# Altium PCB rejestrator_trasy.PcbDoc
Units mil, origin at the board's own origin, x right, y up, seen from the top; angles counter-clockwise.
Board outline 3503.94 x 1574.8 mil, 2 copper layers (Top Layer, Bottom Layer); 47 components, 39 nets, 211 pads, 16 vias.
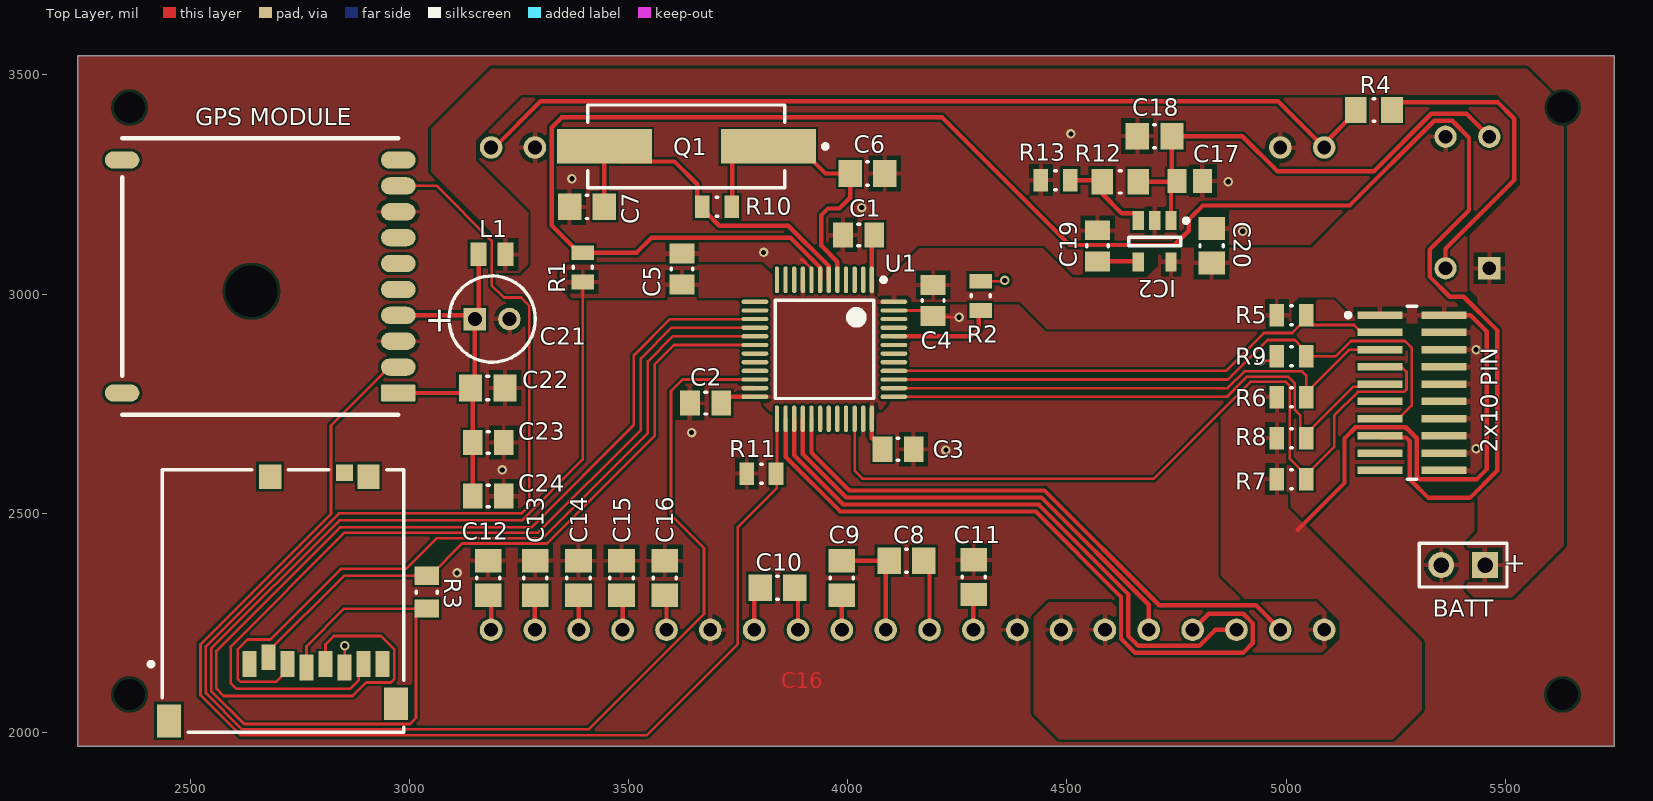
[diagram p0: Top Layer view]
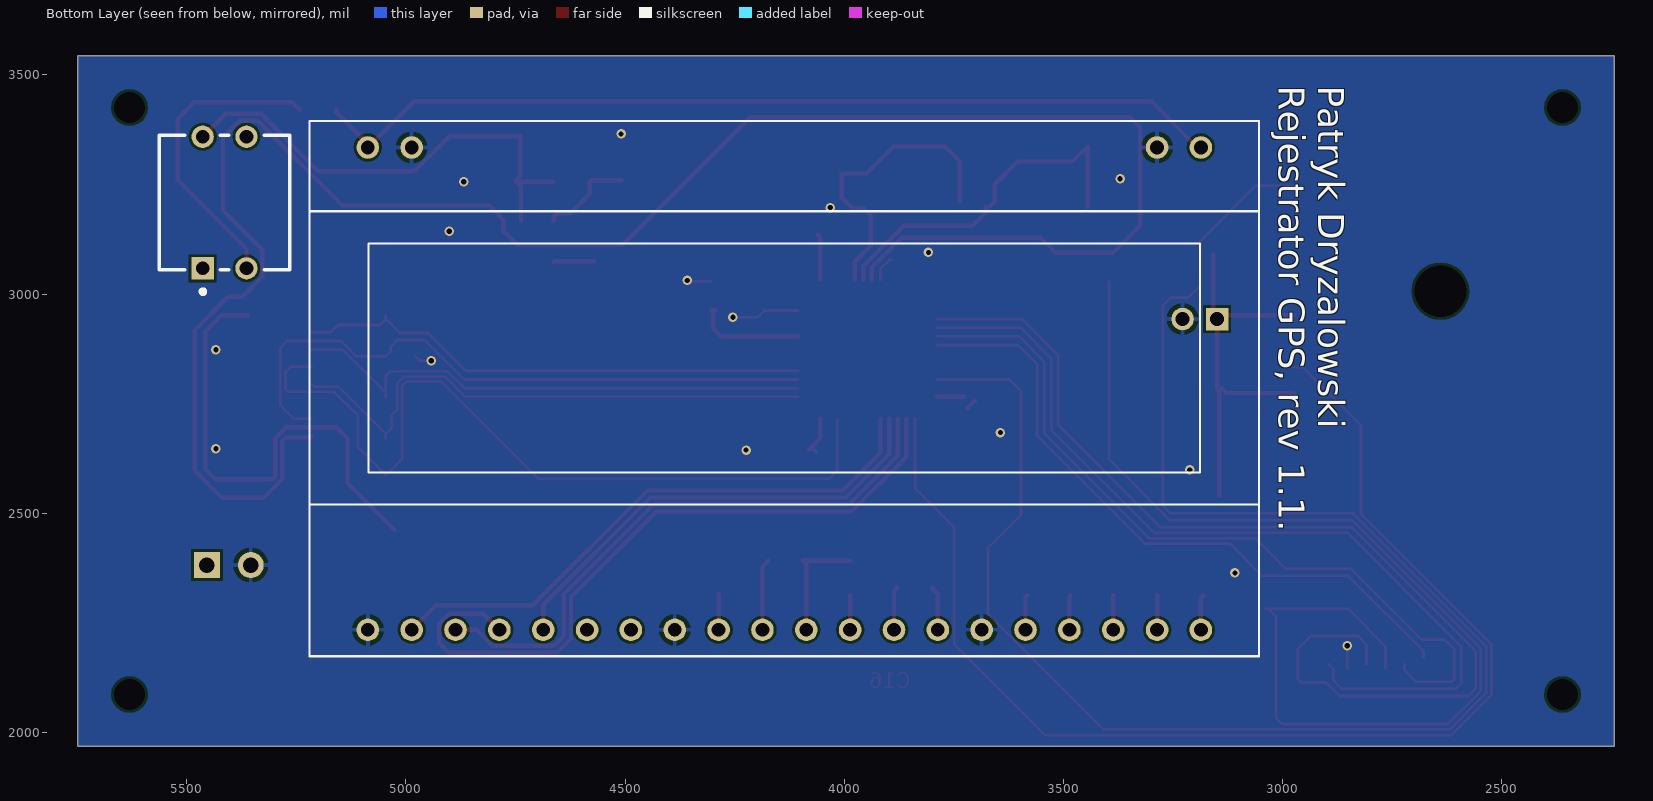
[diagram p1: Bottom Layer view, seen from below]

## Layer stack, top to bottom
Top Solder: solder mask 0.4, Solder Resist, Dk 3.5
Top Layer: signal copper 1.4
Dielectric 1: dielectric 12.6, FR-4, Dk 4.8
Bottom Layer: signal copper 1.4
Bottom Solder: solder mask 0.4, Solder Resist, Dk 3.5

## Board outline
2244.09,1968.5 5748.03,1968.5 5748.03,3543.31 2244.09,3543.31

## Design rules (kind name [scope] priority, off if disabled: settings)
Clearance [All] p1: gap=6 ignorepadtopadclearanceinfootprint=FALSE except(0: Arc-Hole Track-Hole SMDPad-Hole THPad-Hole Via-Hole Fill-Hole Poly-Hole Region-Hole Text-Hole)
PolygonConnect [All] p1: thpad.connectstyle=Relief thpad.reliefconductorwidth=10 thpad.reliefentries=4 thpad.polygonreliefangle="90 Angle" thpad.airgapwidth=10 smdpad.connectstyle=Relief smdpad.reliefconductorwidth=10 smdpad.reliefentries=4 smdpad.polygonreliefangle="90 Angle" smdpad.airgapwidth=10 via.connectstyle=Direct via.reliefconductorwidth=10 via.reliefentries=4 via.polygonreliefangle="90 Angle" via.airgapwidth=10
RoutingVias [All] p1: holewidth=11.81 width=21.65 viastyle="Through Hole" minholewidth=11.81 minwidth=21.65 maxholewidth=11.81 maxwidth=21.65
SolderMaskExpansion [All] p1: expansion=4
Width [All] p1: maxlimit=10 minlimit=6 preferedwidth=10 minimp=50.000000 maximp=50.000000 favimp=50.000000
30 further rules are at their usual default settings.

## Classes and differential pairs
component class PD_SCH_19Z_C: "2x10 PIN" BATT C1 C2 C3 C4 C5 C6 C7 C8 C9 C10 C11 C12 C13 C14 C15 C16 C17 C18 C19 C20 C21 C22 C23 C24 "GPS MODULE" IC2 L1 Q1 R1 R2 R3 R4 R5 R6 R7 R8 R9 R10 R11 R12 R13 U1

## Components (designator, comment, footprint, x,y, rotation, side; value= is the part's Value field where it differs from the comment)
"2x10 PIN" "SV1" "GOLDPIN 2x10 SMD" 5285.43,2775.59 r270 top
BATT "(3xAAA)" BAT-2 5403.54,2381.89 r180 top
C1 "CAP 100nF 25V 0805(2012)" CAPC0805(2012)75_N 4025,3135 r0 top value=100nF
C2 "CAP 100nF 25V 0805(2012)" CAPC0805(2012)75_N 3676,2751 r180 top value=100nF
C3 "CAP 100nF 25V 0805(2012)" CAPC0805(2012)75_N 4115,2646 r0 top value=100nF
C4 "CAP 100nF 25V 0805(2012)" CAPC0805(2012)75_N 4195,2985 r270 top value=100nF
C5 "CAP 100nF 25V 0805(2012)" CAPC0805(2012)75_N 3622.05,3057.09 r90 top value=100nF
C6 "CAP 22pF 10V 0805(2012)" CAPC0805(2012)100_M 4045,3275 r180 top value=22pF
C7 "CAP 22pF 10V 0805(2012)" CAPC0805(2012)100_M 3405.51,3198.82 r0 top value=22pF
C8 "CAP 1uF 10V 0805(2012)" CAPC0805(2012)145_M 4133.86,2391.73 r0 top value=1uF
C9 "CAP 1uF 10V 0805(2012)" CAPC0805(2012)145_M 3986.22,2352.36 r90 top value=1uF
C10 "CAP 1uF 10V 0805(2012)" CAPC0805(2012)145_M 3840,2330 r180 top value=1uF
C11 "CAP 1uF 10V 0805(2012)" CAPC0805(2012)145_M 4287.4,2354.33 r90 top value=1uF
C12 "CAP 1uF 10V 0805(2012)" CAPC0805(2012)145_M 3180,2352.36 r90 top value=1uF
C13 "CAP 1uF 10V 0805(2012)" CAPC0805(2012)145_M 3287.4,2352.36 r90 top value=1uF
C14 "CAP 1uF 10V 0805(2012)" CAPC0805(2012)145_M 3385.83,2352.36 r90 top value=1uF
C15 "CAP 1uF 10V 0805(2012)" CAPC0805(2012)145_M 3484.25,2352.36 r90 top value=1uF
C16 "CAP 1uF 10V 0805(2012)" CAPC0805(2012)145_M 3582.68,2352.36 r90 top value=1uF
C17 "Cap Pol3" C0805 4780,3257.95 r0 top value=100uF
C18 "CAP 1uF 10V 0805(2012)" CAPC0805(2012)145_M 4700,3360 r0 top value=1uF
C19 "CAP 10nF 16V 0805(2012)" CAPC0805(2012)75_N 4570,3110 r270 top value=10nF
C20 "CAP 1uF 10V 0805(2012)" CAPC0805(2012)145_M 4830,3110 r270 top value=1uF
C21 "ECA1HM100" CAPPR55-200-1100X500X1200 3188.98,2942.91 r0 top
C22 "CAP 1uF 10V 0805(2012)" CAPC0805(2012)145_M 3179.13,2785.43 r180 top value=1uF
C23 "CAP 100nF 25V 0805(2012)" CAPC0805(2012)75_N 3180.12,2661.42 r180 top value=100nF
C24 "CAP 10nF 16V 0805(2012)" CAPC0805(2012)75_N 3180.12,2539.37 r180 top value=10nF
DISPLAY "EADOGM132" "EA DOGM132" 4136.61,2854.33 r180 bottom locked
"GPS MODULE" "FGPMMOPA6B" GTPA010 2660,3040 r180 top
IC2 "LP3985" SOT-23 4700,3120 r270 top
L1 "BRC2012T2R2MD" INDC2013X140X50LL20T20 3188.98,3090.55 r180 top
Q1 "Quartz" TXC-9C-2_V 3631.89,3336.61 r180 top
R1 "10K 5% 0805(2012)" RESC0805(2012)_L 3395.67,3061.02 r270 top value=10K
R2 "10K 5% 0805(2012)" RESC0805(2012)_L 4303.15,2996.06 r270 top value=10K
R3 "4K7 5% 0805(2012)" RESC0805(2012)_N 3040,2320 r270 top value=4K7
R4 "100R 5% 0805(2012)" RESC0805(2012)_M 5200,3420 r0 top value=100
R5 "10K 5% 0805(2012)" RESC0805(2012)_L 5012,2952 r180 top value=10K
R6 "10K 5% 0805(2012)" RESC0805(2012)_L 5012,2765 r180 top value=10K
R7 "10K 5% 0805(2012)" RESC0805(2012)_L 5012,2578 r180 top value=10K
R8 "10K 5% 0805(2012)" RESC0805(2012)_L 5012,2671.5 r180 top value=10K
R9 "10K 5% 0805(2012)" RESC0805(2012)_L 5012,2858.5 r0 top value=10K
R10 "1M 5% 0805(2012)" RESC0805(2012)_L 3702,3199 r0 top value=1M
R11 "10K 5% 0805(2012)" RESC0805(2012)_L 3803.15,2590.55 r0 top value=10K
R12 "100R 5% 0805(2012)" RESC0805(2012)_M 4621.65,3255.98 r0 top value=100
R13 "10K 5% 0805(2012)" RESC0805(2012)_L 4474.02,3259.92 r0 top value=10K
"SD SOCKET" "MICROSD" "SD CONN" 2720,2300 r180 top
SW1 "1825057-1" TE_Connectivity_1825057-1_MFG 5413.39,3208.66 r180 bottom
U1 "STM32F103C8T6" LQFP48 3946.85,2874.02 r180 top

## Footprints (in the part's own frame and the unit in brackets; to place one, negate y for a bottom-side part, rotate by r counter-clockwise, add the part's x,y. Pads: shape width x height; smd on the part's side, far side on the other; paste and mask are expansions set on the pad)
BAT-2 [mm] "Battery; 2 Leads"
  rect 1.5x1.5 hole 0.9: 1(-1.27,0)
  round 1.5 hole 0.9: 2(1.27,0)
  silkscreen extent -2.54,-1.27 2.54,1.27
C0805 [mm] "Chip Capacitor, Body 2.0x1.3mm, IPC High Density"
  rect 1.1x1.4 smd: 1(-0.75,0) 2(0.75,0)
  body extent -1.1,-0.72 1.1,0.72, height 1.4
CAPC0805(2012)75_N [mm] "Chip Capacitor, Body 2.0x1.2mm, Height 0.75mm, IPC Medium Density"
  rect 1.15x1.45 smd: 1(-0.9,0) 2(0.9,0)
  silkscreen extent -0.05,-0.62 0.05,0.62, body extent -1.1,-0.72 1.1,0.73, height 0.75
CAPC0805(2012)100_M [mm] "Chip Capacitor, Body 2.0x1.2mm, Height 1.0mm, IPC Low Density"
  rect 1.35x1.55 smd: 1(-1,0) 2(1,0)
  silkscreen extent -0.05,-0.67 0.05,0.68, body extent -1.1,-0.72 1.1,0.72, height 1
CAPC0805(2012)145_M [mm] "Chip Capacitor, Body 2.0x1.2mm, Height 1.45mm, IPC Low Density"
  rect 1.35x1.55 smd: 1(-1,0) 2(1,0)
  silkscreen extent -0.05,-0.67 0.05,0.67, body extent -1.1,-0.72 1.1,0.72, height 1.45
CAPPR55-200-1100X500X1200 [mm] "THD, 2-Leads, Dia 5mm, Body Length 11mm"
  rect 1.3x1.3 hole 0.8: 1(-1,0)
  round 1.3 hole 0.8: 2(1,0)
  silkscreen extent -2.5,-2.5 2.5,2.5, body extent -2.5,-2.5 2.5,2.5, height 12
"EA DOGM132" [mm]
  round 1.308 hole 0.8: 1(-24.13,12.19) 2(-21.59,12.19) 19(21.59,12.19) 20(24.13,12.19) 21(24.13,-15.75) 22(21.59,-15.75) 23(19.05,-15.75) 24(16.51,-15.75) 25(13.97,-15.75) 26(11.43,-15.75) 27(8.89,-15.75) 28(6.35,-15.75) 29(3.81,-15.75) 30(1.27,-15.75) 31(-1.27,-15.75) 32(-3.81,-15.75) 33(-6.35,-15.75) 34(-8.89,-15.75) 35(-11.43,-15.75) 36(-13.97,-15.75) 37(-16.51,-15.75) 38(-19.05,-15.75) 39(-21.59,-15.75) 40(-24.13,-15.75)
  silkscreen extent -27.5,-17.28 27.5,13.72, body extent -27.5,-17.25 27.5,13.75, height 3
"GOLDPIN 2x10 SMD" [mm]
  rect 0.44x2.6 smd: 1(-4.481,-1.811) 2(-4.481,1.889) 3(-3.481,-1.811) 4(-3.481,1.889) 5(-2.481,-1.811) 6(-2.481,1.889) 7(-1.481,-1.811) 8(-1.481,1.889) 9(-0.481,-1.811) 10(-0.481,1.889) 11(0.519,-1.811) 12(0.519,1.889) 13(1.519,-1.811) 14(1.519,1.889) 15(2.519,-1.811) 16(2.519,1.889) 17(3.519,-1.811) 18(3.519,1.889) 19(4.519,-1.811) 20(4.519,1.889)
  silkscreen extent -4.98,-3.79 5.02,0.3, body extent -4.98,-2.56 5.02,2.64, height 3.5
GTPA010 [mm]
  rrect20% 2x1 smd: 1(-8,6.75)
  rrect100% 2x1 smd: 2(-8,5.25) 3(-8,3.75) 4(-8,2.25) 5(-8,0.75) 6(-8,-0.75) 7(-8,-2.25) 8(-8,-3.75) 9(-8,-5.25) 10(-8,-6.75) 11(8,6.75) 12(8,-6.75)
  rrect100% 0x0 hole 3 unplated: 13(0.5,0.85)
  silkscreen extent -8,-8 8,8, body extent -8.01,-8 8.01,8, height 6.49
INDC2013X140X50LL20T20 [mm] "Chip Inductor, 2-Leads, Body 2.2x1.45mm, IPC High Density"
  rect 0.93x1.37 smd: 1(-0.785,0) 2(0.785,0)
  body extent -1.1,-0.72 1.1,0.72, height 1.4
LQFP48 [mm]
  oval 0.25x1.55 smd: 1(-2.75,-4.025) 2(-2.25,-4.025) 3(-1.75,-4.025) 4(-1.25,-4.025) 5(-0.75,-4.025) 6(-0.25,-4.025) 7(0.25,-4.025) 8(0.75,-4.025) 9(1.25,-4.025) 10(1.75,-4.025) 11(2.25,-4.025) 12(2.75,-4.025) 25(2.75,4.025) 26(2.25,4.025) 27(1.75,4.025) 28(1.25,4.025) 29(0.75,4.025) 30(0.25,4.025) 31(-0.25,4.025) 32(-0.75,4.025) 33(-1.25,4.025) 34(-1.75,4.025) 35(-2.25,4.025) 36(-2.75,4.025)
  oval 1.55x0.25 smd: 13(4.025,-2.75) 14(4.025,-2.25) 15(4.025,-1.75) 16(4.025,-1.25) 17(4.025,-0.75) 18(4.025,-0.25) 19(4.025,0.25) 20(4.025,0.75) 21(4.025,1.25) 22(4.025,1.75) 23(4.025,2.25) 24(4.025,2.75) 37(-4.025,2.75) 38(-4.025,2.25) 39(-4.025,1.75) 40(-4.025,1.25) 41(-4.025,0.75) 42(-4.025,0.25) 43(-4.025,-0.25) 44(-4.025,-0.75) 45(-4.025,-1.25) 46(-4.025,-1.75) 47(-4.025,-2.25) 48(-4.025,-2.75)
  silkscreen extent -3.55,-4.15 2.85,2.85, body extent -3.5,-3.5 3.5,3.5, height 6
RESC0805(2012)_L [mm] "Chip Resistor, Body 2.0x1.3mm, IPC High Density"
  rect 0.85x1.3 smd: 1(-0.85,0) 2(0.85,0)
  silkscreen extent -0.05,-0.55 0.05,0.55, body extent -1.1,-0.67 1.1,0.68, height 0.7
RESC0805(2012)_M [mm] "Chip Resistor, Body 2.0x1.3mm, IPC Low Density"
  rect 1.25x1.5 smd: 1(-1.05,0) 2(1.05,0)
  silkscreen extent -0.05,-0.65 0.05,0.65, body extent -1.1,-0.67 1.1,0.67, height 0.7
RESC0805(2012)_N [mm] "Chip Resistor, Body 2.0x1.3mm, IPC Medium Density"
  rect 1.05x1.4 smd: 1(-0.95,0) 2(0.95,0)
  silkscreen extent -0.05,-0.6 0.05,0.6, body extent -1.1,-0.67 1.1,0.68, height 0.7
"SD CONN" [mm]
  rect 0.8x1.5 smd: 1(2.14,3.66) 2(1.04,3.26) 3(-0.06,3.66) 4(-1.16,3.86) 5(-2.26,3.66) 6(-3.36,3.86) 7(-4.46,3.66) 8(-5.56,3.66)
  rect 1x0.95 smd: 9(-3.36,-7.425)
  rect 1.3x1.4 smd: 10(-4.75,-7.2) 11(0.95,-7.2)
  rect 1.4x1.9 smd: 12(6.8,6.95) 13(-6.35,5.95)
  silkscreen extent -6.8,-7.6 7.97,7.6, body extent -6.85,-7.68 7.25,7.52, height 1.85
SOT-23 [mm]
  rect 1.1x0.65 smd: 1(-1.2,0.95) 2(-1.2,0) 3(-1.2,-0.95) 4(1.2,-0.95) 5(1.2,0.95)
  silkscreen extent -1.32,-1.5 0.25,1.95, body extent -0.83,-1.49 8.59,1.5, height 3
TE_Connectivity_1825057-1_MFG [mm]
  rect 1.29x1.29 hole 0.79 paste-1000 mask+0: 1(-1.27,-3.81)
  round 1.29 hole 0.79 paste-1000 mask+0: 2(1.27,-3.81) 3(1.27,3.81) 4(-1.27,3.81)
  silkscreen extent -3.78,-5.28 3.78,3.9, body extent -3.53,-4.19 3.53,4.19, height 6.15
TXC-9C-2_V [mm] "SMD, 2-Leads, Body 11.4 x 4.8 mm, Height 4.1 mm"
  rect 5.5x2 smd: 1(-4.75,0) 2(4.75,0)
  silkscreen extent -8.18,-2.4 5.7,2.4, body extent -5.7,-2.4 5.7,2.4, height 4.1

## Part data
BATT: library part Battery, "Multicell Battery", LatestRevisionDate=17-Jul-2002, LatestRevisionNote="Re-released for DXP Platform.", PackageDescription="Battery; 2 Leads", PackageReference=BAT-2, Published=24-Mar-1999, Publisher="Altium Limited"
C1 C2 C3 C4 C5 C23: library part CMP-1036-04415-1, "CAP 100nF 25V -20% to +80% 0805 (2012 Metric) Thickness 0.75mm SMD", Case-EIA=0805, Case-Metric=2012, Rated Voltage="25 V", Tolerance="-20% to +80%", Max Thickness="0.75 mm", Technology=SMT
C6 C7: library part CMP-1036-01213-1, "CAP 22pF 10V ±20% 0805 (2012 Metric) Thickness 1mm SMD", Case-EIA=0805, Case-Metric=2012, Rated Voltage="10 V", Tolerance=±20%, Max Thickness="1 mm", Technology=SMT
C8 C9 C10 C11 C12 C13 C14 C15 C16 C18 C20 C22: library part CMP-1036-04740-1, "CAP 1uF 10V ±20% 0805 (2012 Metric) Thickness 1.45mm SMD", Case-EIA=0805, Case-Metric=2012, Rated Voltage="10 V", Tolerance=±20%, Max Thickness="1.45 mm", Technology=SMT
C17: "Polarized Capacitor (Surface Mount)", LatestRevisionDate=29-May-2009, LatestRevisionNote="IPC-7351 Footprint Added.", PackageDescription="Chip Capacitor", PackageReference=C0805, Published=8-Jun-2000, Publisher="Altium Limited"
C19 C24: library part CMP-1036-03821-1, "CAP 10nF 16V ±20% 0805 (2012 Metric) Thickness 0.75mm SMD", Case-EIA=0805, Case-Metric=2012, Rated Voltage="16 V", Tolerance=±20%, Max Thickness="0.75 mm", Technology=SMT
C21: library part CMP-2100-03622-1, "Aluminum Electrolytic Capacitor, 10 uF, +/- 20%, 50 V, -40 to 85 degC, 2-Pin THD, RoHS, Bulk", Capacitance=10uF, Case/Package=Radial, Dielectric Material=Aluminium, Leakage Current=3uA, Manufacturer=Panasonic, Max Operating Temperature=85degC, Min Operating Temperature=-40degC, Package Description="2-Pin Radial Lead, Dia 5 mm, Height 12 mm", Package Quantity=200, Package Reference=CAPPR55-200-1100X500X1200, Ripple Current=65mA, Tolerance=20%, Voltage=50V, Datasheet URL=https://industrial.panasonic.com/cdbs/www-data/pdf/RDF0000/ABA0000C1218.pdf, Datasheet Version="Rev. 05, 10/2016", Diameter=5mm, Dissipation Factor=0.12%, Height=11mm, Height - Seated (Max)=0.472inch, Lead/Base Style=Straight, Lead Diameter=0.5mm, Lead Free=LeadFree, Lead Pitch=2mm, Length=11mm, Life (Hours)=2000Hour, Manufacturer URL=http://www.panasonic.com/, Mount=ThroughHole, Number of Pins=2, Packaging=Bulk, Radiation Hardening=No, REACH SVHC=NoSVHC, Ripple Current (AC)=65mA, RoHSCompliant=true, Termination=Radial, Voltage Rating=50V, Voltage Rating (DC)=50V
DISPLAY: library part "EA DOGM132"
L1: library part CMP-2000-05964-1, "Wire-Wound Chip Power Inductor, 2.2 uH, +/- 20%, -40 to 105 degC, 2-Pin SMD (0805), RoHS, Tape and Reel", Current - Saturation=1.1A, Current Rating=1A, DC Resistance (DCR)=143mOhmMax, Frequency - Self Resonant=350MHz, Frequency - Test=1MHz, Inductance=10uH, Manufacturer="Taiyo Yuden", Operating Temperature=-40°C~105°C, Package / Case=0805(2012Metric), Package Description="2-Pin Surface Mount Device, Body 2 x 1.25 mm", Package Reference=0805, Standard Package=2,000, Tolerance=±20%, Category=Inductors,Coils,Chokes, Datasheet URL=http://ds.yuden.co.jp/TYCOMPAS/ut/detail.do?productNo=BRC2012T2R2MD&fileName=BRC2012T2R2MD_SS&mode=specSheetDownload, Datasheet Version=09/2016, EDA / CAD Models=DownloadfromAcceleratedDesigns, Family=FixedInductors, Manufacturer URL=http://www.t-yuden.com/, Mounting Technology=SurfaceMount, Mounting Type=SurfaceMount, Online Catalog=BRSeries, Other Names="587-2905-2 / LQBRC2012T2R2MD", Packaging=Tape&Reel(TR), Series=BR, Shielding=Unshielded, Type=Wirewound
Q1: library part CMP-0724-00001-1, "9C Series Quartz Crystal, 3.6864 MHz, +/-50 ppm, 20 pF, -40 to 85 degC, 2-Pin 11.4 x 4.8 x 4.1 mm SMD, RoHS, Tape and Reel", Frequency=8.00MHz, Frequency Stability (over Temp.)="+/-50 ppm (-20 to 70 degC)", Frequency Tolerance (at 25 degC)="+/-50 ppm", Load Capacitance="20 pF", Manufacturer=TXC, Operating Temperature Range="-40 to 85 degC", PartNumber=9C-3.6864MBBK-T, ComponentLink1Description="Manufacturer URL", ComponentLink1URL=http://www.txccrystal.com/, ComponentLink2Description=Datasheet, ComponentLink2URL=http://www.txccrystal.com/images/pdf/9c.pdf, ComponentLink3Description="Package Specification", ComponentLink3URL=http://www.txccrystal.com/images/pdf/9c.pdf, DatasheetVersion=Jun-10, Mounting Technology="Surface Mount", PackageDescription="2-Pin SMD, Body 11.4 x 4.8 mm, Height 4.1 mm", PackageReference=9C-2, PackageVersion=Jun-10, Packing="Tape and Reel", RoHS=TRUE
R1 R2 R5 R6 R7 R8 R9 R11 R13: library part CMP-1013-00098-1, "10K 0.125W 5% 0805 (2012 Metric)  SMD", Case-EIA=0805, Case-Metric=2012, Power="0.125 W", Tolerance="5 %", Technology=SMT
R3: library part CMP-1013-00090-1, "4K7 0.125W 5% 0805 (2012 Metric)  SMD", Case-EIA=0805, Case-Metric=2012, Power="0.125 W", Tolerance="5 %", Technology=SMT
R4 R12: library part CMP-1013-00050-1, "100R 0.125W 5% 0805 (2012 Metric)  SMD", Case-EIA=0805, Case-Metric=2012, Power="0.125 W", Tolerance="5 %", Technology=SMT
R10: library part CMP-1013-00146-1, "1M 0.125W 5% 0805 (2012 Metric)  SMD", Case-EIA=0805, Case-Metric=2012, Power="0.125 W", Tolerance="5 %", Technology=SMT
SW1: library part CMP-03205-00126-1, "SWITCH SLIDE DIP SPST 100MA 24V", Contact Current Rating=100mA, Contact Resistance=50m?, Manufacturer="TE Connectivity", Temperature="-30°C to +85°C", Temperature Range High=+85°C, Temperature Range Low=-30°C, Voltage Rating Dc=24V, Automotive=No, ComponentLink1Description=Datasheet, ComponentLink1URL=https://www.te.com/usa-en/product-1825057-1.html?te_bu=Cor&te_type=other&te_campaign=oct_glo_cor-oct-global-oth-prtnr-fy19-oct-octo-buy-bom_sma-298_2&elqCampaignId=35216, Electromechanical Life=1000Cycles, Height=6.15mm, Lead Free=Yes, Mount="Through Hole", Number Of Circuits=2, Package=1825057-1, PartId=1, Part Number=1825057-1, RoHS=TRUE, Standoff Height=1.3mm, Throw Configuration=SPST
"GPS MODULE": helpURL=https://cdn-shop.adafruit.com/datasheets/PA6B-Datasheet-A07.pdf, Supplier=GlobalTop
U1: helpURL=https://pdf1.alldatasheet.com/datasheet-pdf/view/201596/STMICROELECTRONICS/STM32F103C8T6.html, Supplier=STMicroelectronics

## Free pads (board coordinates)
  round 0 hole 70.87: 45(2362.2,2086.61) 45(2362.2,3425.2) 45(5629.92,2086.61) 45(5629.92,3425.2)

## Via types
v1: diameter 21.65, hole 11.81, Top Layer to Bottom Layer, tented both sides, 16 vias

## Nets (pads, with @x,y where several pads share a name; then routed paths per layer and width w, separated by ;. In a path a pad name is that pad's centre, name@x,y a point inside that pad or via, vN(x,y) a via of type N, cw(c..) or ccw(c..) an arc to the next point about the centre after c; other vN are vias at no path point)
+3V3: "2x10 PIN.1" "2x10 PIN.2" "SD SOCKET.4" C1.2 C2.1 C3.1 C4.1 C5.1 C20.2 DISPLAY.34 DISPLAY.35 IC2.5 R1.2 R3.2 R5.2 R6.2 R7.2 R8.2 SW1.3 U1.1 U1.9 U1.24 U1.36 U1.48 | length 4048.2
  Top Layer w6: 2765.67,2148.03 2765.67,2196.67 2851.6,2282.6 R3.2@3033.11,2282.6 ; R3.2 R3.2@3033.11,2282.6 ; R1.2 3395.67,2622.7 3256.97,2484 2840.78,2484 2548,2191.22 2548,2095.03 2623.68,2019.35 3001.29,2019.35 3015.44,2033.5 3015.44,2264.93 R3.2@3033.11,2282.6
  Top Layer w10: C2.1@3702.57,2756 C2.1@3718.75,2739.82 ; C2.1@3726.18,2765.75 U1.24 ; U1.36 4055.12,2670.45 C3.1 ; U1.1 4055.12,3129.68 C1.2 ; C3.1@4064.57,2640 C3.1@4070.12,2645.55 ; 5026,2462 5133,2569 5133,2670.68 5158.4,2696.08 5272.55,2696.08 5297.62,2671.01 5297.62,2584.46 5304.07,2578.02 5435.02,2578.02 5457,2600 5457,2915 5419.99,2952.01 5359.8,2952.01
GND: "2x10 PIN.4" "2x10 PIN.6" "2x10 PIN.8" "2x10 PIN.10" "2x10 PIN.12" "2x10 PIN.14" "2x10 PIN.16" "2x10 PIN.18" "2x10 PIN.20" "GPS MODULE.3" "GPS MODULE.8" "SD SOCKET.6" BATT.2 C1.1 C2.2 C3.2 C4.2 C5.2 C6.1 C7.1 C11.2 C12.2 C13.2 C14.2 C15.2 C16.2 C17.2 C18.1 C19.1 C20.1 C21.2 C22.1 C23.1 C24.1 DISPLAY.2 DISPLAY.19 DISPLAY.26 DISPLAY.33 DISPLAY.40 IC2.2 R2.1 R9.1 R11.1 R13.1 U1.8 U1.23 U1.35 U1.47 | length 360.3
  Top Layer w6: 2852.28,2148.03 2853,2148.75 v1(2853,2198) ; 3893,3079 3894,3078 3897.4,3078 3917.32,3058.07 U1.8 ; U1.47 4181.97,2962.6 C4.2 4197.57,2947 v1(4254,2947) ; R2.1 4356.53,3029.53 v1(4358,3031) ; v1(4942,2848) 4968.04,2848 R9.1
  other v1: 3109,2364 3212,2599 4224,2644 5433,2647 3644,2684 5433,2873 3808,3095 4901,3143 4032,3197 4868,3256 3371,3263 4509,3365
"Net2x10 PIN_3": "2x10 PIN.3" R5.1 U1.40 | length 1179.3
  Top Layer w6: U1.40 4862.8,2824.8 4949.09,2911.09 5013.41,2911.09 R5.1@5045.46,2943.14 ; R5.1 R5.1@5045.46,2943.14 ; 5214.13,2912.64 5171.61,2912.64 5154.84,2929.41 5059.2,2929.41 R5.1@5045.46,2943.14
"Net2x10 PIN_5": "2x10 PIN.5" R6.1 U1.38 | length 1218.9
  Top Layer w6: U1.38 4866.29,2785.43 4904.44,2823.59 5036.02,2823.59 5045.46,2814.14 R6.1@5045.46,2773.86 ; R6.1 R6.1@5045.46,2773.86 ; 5214.13,2873.27 5144.87,2873.27 R6.1@5045.46,2773.86
"Net2x10 PIN_7": "2x10 PIN.7" R7.1 U1.34 | length 1890
  Top Layer w6: U1.34 4015.75,2597.08 4033.83,2579 4698,2579 4918.59,2799.59 4999,2799.59 5007.73,2790.86 5007.73,2624.59 5045.46,2586.86 5109.21,2650.6 5109.21,2722.8 5163.27,2776.87 5269.04,2776.87 5274.31,2782.14 5274.31,2822.69 5263.1,2833.9 5214.13,2833.9
"Net2x10 PIN_9": "2x10 PIN.9" R8.1 U1.37 | length 1290.9
  Top Layer w6: U1.37 4864.75,2765.75 4910.59,2811.59 5003.97,2811.59 5019.73,2795.83 5019.73,2735.68 5031.73,2723.68 5031.73,2694.09 R8.1@5045.46,2680.36 ; R8.1 R8.1@5045.46,2680.36 ; 5214.13,2794.53 5208.47,2788.87 5153.97,2788.87 R8.1@5045.46,2680.36
"Net2x10 PIN_13": "2x10 PIN.13" R9.2 U1.39 | length 1477.2
  Top Layer w6: U1.39 4867.27,2805.12 4957.25,2895.09 5019.91,2895.09 5034.14,2880.86 5034.14,2869.82 R9.2 5113.14,2858.5 5147.64,2893 5271,2893 5286.31,2877.69 5286.31,2745.45 5256.65,2715.79 5214.13,2715.79
"Net2x10 PIN_15": "2x10 PIN.15" R1.1 U1.7 | length 4582.6
  Top Layer w10: U1.7 3937.01,3060.9 3869.91,3128 3552.02,3128 3518.51,3094.49 R1.1 3386.81,3094.49 3325,3156.3 3325,3379.93 3348.07,3403 4215,3403 4506.21,3111.79 4744.79,3111.79 4777.49,3144.49 4777.49,3169.51 4786.47,3178.48 4809.99,3202 5144.63,3202 5337.68,3395.06 5378.46,3395.06 5417,3356.52 5417,3191 5326.99,3100.99 5326.99,3040.01 5373,2994 5405,2994 5481,2918 5481,2597 5419,2535 5324.45,2535 5281.62,2577.83 5281.62,2664.38 5273.24,2672.76 5217.79,2672.76 5214.13,2676.42
NetBATT_1: BATT.1 L1.1 SW1.1
NetC6_2: C6.2 Q1.1 R10.2 U1.5 | length 699
  Top Layer w10: R10.2@3736.46,3212 3736.46,3302.24 3770.83,3336.61 Q1.1 3887.8,3336.61 3949.41,3275 C6.2 4005.63,3220 3980.63,3195 3955,3195 3940,3180 3940,3110 3976.38,3073.62 U1.5
NetC7_2: C7.2 Q1.2 R10.1 U1.6 | length 816.6
  Top Layer w10: C7.2 Q1.2 3479.25,3302.24 3604.76,3302.24 3656.8,3250.2 3656.8,3210.73 R10.1 ; R10.1@3676,3199 3676,3187 3707,3156 3864.54,3156 3956.61,3063.92 3956.61,3032.56 U1.6
NetC8_1: C8.1 C9.2 DISPLAY.30 | length 269
  Top Layer w10: C9.2 C8.1 4086.61,2383.86 DISPLAY.30
NetC8_2: C8.2 DISPLAY.31 | length 163
  Top Layer w10: C8.2 4186.61,2378.35 DISPLAY.31
NetC9_1: C9.1 DISPLAY.29 | length 78.9
  Top Layer w10: C9.1 3986.61,2312.6 DISPLAY.29
NetC10_1: C10.1 DISPLAY.28 | length 98.7
  Top Layer w10: C10.1 3886.61,2322.76 DISPLAY.28
NetC10_2: C10.2 DISPLAY.27 | length 101.6
  Top Layer w10: DISPLAY.27 3786.61,2315.98 C10.2
NetC11_1: C11.1 DISPLAY.32 | length 81
  Top Layer w10: DISPLAY.32 4286.61,2314.17 C11.1
NetC12_1: C12.1 DISPLAY.21 | length 81.5
  Top Layer w10: C12.1 3186.61,2306.38 DISPLAY.21
NetC13_1: C13.1 DISPLAY.22 | length 79.1
  Top Layer w10: DISPLAY.22 3286.61,2312.2 C13.1
NetC14_1: C14.1 DISPLAY.23 | length 79.1
  Top Layer w10: C14.1 3386.61,2312.2 DISPLAY.23
NetC15_1: C15.1 DISPLAY.24 | length 79.7
  Top Layer w10: C15.1 3486.61,2310.63 DISPLAY.24
NetC16_1: C16.1 DISPLAY.25 | length 80.4
  Top Layer w10: C16.1 3586.61,2309.06 DISPLAY.25
NetC17_1: C17.1 C18.2 IC2.1 R12.2 SW1.4 | length 1121.4
  Top Layer w10: R12.2 C17.1@4748.5,3255.98 ; IC2.1 4737.4,3244.88 C17.1@4748.5,3255.98 ; SW1.4 5410.99,3411.06 5331.06,3411.06 5200,3280 4980,3280 4900,3360 C18.2 4739.37,3269.05 C17.1 C17.1@4748.5,3255.98
NetC19_2: C19.2 IC2.4 | length 93.3
  Top Layer w10: C19.2 4660.79,3074.57 IC2.4
NetC21_1: "GPS MODULE.1" "GPS MODULE.4" C21.1 C22.2 C23.2 C24.2 L1.2 | length 904.3
  Top Layer w10: 2974.96,2774.25 3128.58,2774.25 C22.2 ; 2974.96,2951.42 3141.1,2951.42 C21.1 ; C24.2 C23.2 3144.69,2780.51 3149.61,2785.43 C21.1 ; L1.2 3158.07,2951.38 C21.1
NetDISPLAY_1: DISPLAY.1 DISPLAY.20 R4.1 | length 2103.2
  Top Layer w10: DISPLAY.20 3194.25,3334.25 3300,3440 4980.87,3440 DISPLAY.1 5086.61,3343.03 5158.66,3415.08 R4.1
NetDISPLAY_36: DISPLAY.36 U1.28 | length 1069
  Top Layer w10: U1.28 3897.64,2634.99 3996.63,2536 4441.94,2536 4686.61,2291.33 DISPLAY.36
NetDISPLAY_37: DISPLAY.37 U1.26 | length 1608.8
  Top Layer w10: U1.26 3858.27,2629.1 3983.37,2504 4428.69,2504 4623.36,2309.32 4623.36,2214.01 4655.87,2181.5 4901.5,2181.5 4923.36,2203.36 4923.36,2249.47 4901.84,2271 4823.36,2271 DISPLAY.37
NetDISPLAY_38: DISPLAY.38 U1.27 | length 1343.2
  Top Layer w10: U1.27 3877.95,2632.05 3990,2520 4435.31,2520 4639.36,2315.95 4639.36,2220.64 4662.5,2197.5 4801.84,2197.5 4838.58,2234.25 DISPLAY.38
NetDISPLAY_39: DISPLAY.39 U1.29 | length 1314.1
  Top Layer w10: U1.29 3917.32,2637.93 4003.25,2552 4448.57,2552 4710.57,2290 4930.87,2290 DISPLAY.39
"NetGPS MODULE_2": "GPS MODULE.2" R11.2 U1.25 | length 2847.8
  Top Layer w6: 2974.96,2833.31 2955.28,2833.31 2821.6,2699.63 2821.6,2498.76 2524,2201.16 2524,2085.09 2615.09,1994 3542,1994 3749,2201 3749,2468 3838,2557 3838,2589.16 R11.2 3838.58,2592.52 U1.25
"NetGPS MODULE_9": "GPS MODULE.9" U1.22 | length 3925.5
  Top Layer w6: 2974.96,3246.69 3062.76,3246.69 3188,3121.45 3188,3020 3216,2992 3255,2992 3274,2973 3274,2518 3255.83,2499.83 2839.64,2499.83 2536,2196.19 2536,2090.06 2618.71,2007.35 3408.85,2007.35 3672.2,2270.7 3672.2,2420.8 3597,2496 3597,2779 3623.12,2805.12 U1.22
NetIC2_3: IC2.3 R12.1 R13.2 | length 214.7
  Top Layer w10: R13.2 4576.38,3259.92 R12.1 4580.32,3228.68 4625.1,3183.9 4654.8,3183.9 4662.6,3176.1 IC2.3
NetR2_2: R2.2 U1.44 | length 252.8
  Top Layer w10: U1.44 4280.98,2903.54 4298.72,2921.28 4298.72,2958.17 4294.29,2962.6 R2.2
NetR3_1: "SD SOCKET.2" R3.1 U1.18 | length 1507.9
  Top Layer w6: 2679.05,2171.65 2679.05,2185.43 2851.02,2357.4 R3.1 3046.89,2357.4 3120.49,2431 3314,2431 3560,2677 3560,2840 3603.86,2883.86 U1.18
NetR4_2: R4.2 SW1.2 | length 707.2
  Top Layer w10: R4.2 5258.34,3437 5483,3437 5520,3400 5520,3260 5363.39,3103.39 SW1.2
"NetSD SOCKET_3": "SD SOCKET.3" U1.17 | length 1779.7
  Top Layer w6: 2656.19,2115.52 2656.05,2115.38 ; 2722.36,2155.91 2722.36,2142.13 2695.61,2115.38 2656.05,2115.38 ; U1.17 3600.92,2903.54 3544,2846.63 3544,2683.63 3303.37,2443 3061.81,2443 2992.22,2373.4 2844.4,2373.4 2683.17,2212.18 2631.19,2212.18 2609,2189.99 2609,2121.82 2615.44,2115.38 2656.05,2115.38
"NetSD SOCKET_5": "SD SOCKET.5" U1.15 | length 2440
  Top Layer w6: 2808.98,2155.91 2808.98,2200.98 2828,2220 2935.64,2220 2965.65,2189.99 2965.65,2189.64 2965.86,2189.43 2965.86,2122.03 2957.97,2114.15 2901.86,2114.15 2871.09,2083.38 2576.62,2083.38 2560,2100 2560,2186.24 2841.76,2468 3279,2468 3512,2701 3512,2859.88 3595.03,2942.91 U1.15
"NetSD SOCKET_7": "SD SOCKET.7" U1.16 | length 2022.4
  Top Layer w6: 2895.59,2155.91 2884.84,2145.16 2884.84,2119.76 2864.46,2099.38 2605.86,2099.38 2593,2112.24 2593,2196.62 2852.38,2456 3293.75,2456 3528,2690.25 3528,2853.25 3597.97,2923.23 U1.16
pads on no net: "2x10 PIN.11" "2x10 PIN.17" "2x10 PIN.19" "GPS MODULE.5" "GPS MODULE.6" "GPS MODULE.7" "GPS MODULE.10" "GPS MODULE.11" "GPS MODULE.12" "GPS MODULE.13" "SD SOCKET.1" "SD SOCKET.8" "SD SOCKET.9" "SD SOCKET.10" "SD SOCKET.11" "SD SOCKET.12" "SD SOCKET.13" U1.2 U1.3 U1.4 U1.10 U1.11 U1.12 U1.13 U1.14 U1.19 U1.20 U1.21 U1.30 U1.31 U1.32 U1.33 U1.41 U1.42 U1.43 U1.45 U1.46

## Polygon pours and split planes (outlines as drawn)
GND on Top Layer "GND_L01_P004" (solid, pour order 4): 2244.09,1968.5 5748.03,1968.5 5748.03,3543.31 2244.09,3543.31
NetBATT_1 on Top Layer "NETBATT_1_L01_P000" (solid, remove dead copper, pour order 0): 3188,3048 3251,3048 3271,3068 3271,3185 3152,3304 3152,3351 3255,3454 5480,3454 5534,3400 5534,3249 5419,3134 5419,3010 5437,2992 5437,2457 5412,2432 5412,2325 5428,2309 5516,2309 5633,2426 5633,3430 5549,3514 3187,3514 3050,3377 3050,3279 3188,3141
+3V3 on Top Layer "+3V3_L01_P002" (solid, remove dead copper, pour order 2): 5353,3387 5375,3387 5406,3356 5406,3192 5330,3116 5330,3037 5412.15,2954.85 5412.15,2942.18 5402.98,2933 5172,2933 5112,2993 5029,2993 5012,2976 5012,2936 4996,2920 4455,2920 4392.72,2982.28 4365.28,2982.28 4105.31,2982.28 4105.31,2765.75 4055.12,2715.55 3838.58,2715.55 3788.39,2765.75 3788.39,2982.28 3779.67,2991 3371,2991 3343,3019 3343,3049 3361,3067 3804.06,3067 3838.58,3032.48 4091.48,3032.48 4163,3104 4445,3104 4512,3037 4681,3037 4708,3064 4708,3092 4722,3106 5058,3106 5335,3383
+3V3 on Top Layer "+3V3_L01_P001" (solid, remove dead copper, pour order 1): 4958.79,2799.59 4963.16,2795.22 5003.36,2795.22 5003.36,2512.64 5309,2207 5309,2051 5243,1985 4482,1985 4424,2043 4424,2263 4458,2297 4601,2297 4618,2280 4618,2219.37 4661.37,2176 5085,2176 5122,2213 5122,2254 5071,2305 4905,2305 4851,2359 4851,2732 4918.59,2799.59
GND on Bottom Layer "GND_L02_P006" (solid, pour order 6): 2244.09,1968.5 5748.03,1968.5 5748.03,3543.31 2244.09,3543.31

## Other copper
Top Layer:
  text "C16" at 3848,2090 h60

## Silkscreen, mask and mechanical layers (free items; w line width, h text height)
Bottom Overlay:
  text "Patryk Dryzalowski / Rejestrator GPS, rev 1.1." at 3009,3475 h60 r90
Drill Drawing:
  the board outline again, w3.94

## Text inside footprints (layer, text, board x,y; h text height)
BATT: Top Overlay "+" at 5548.03,2404.61 h45.28 r180
C21: Top Overlay "+" at 3035.12,2913.9 h59.06